# Altium PCB 0-PCB4.PcbDoc
Units mil, origin at the board's own origin, x right, y up, seen from the top; angles counter-clockwise.
Board outline 1878.39 x 1878.39 mil, 2 copper layers (Top Layer, Bottom Layer); 29 components, 33 nets, 249 pads, 28 vias.
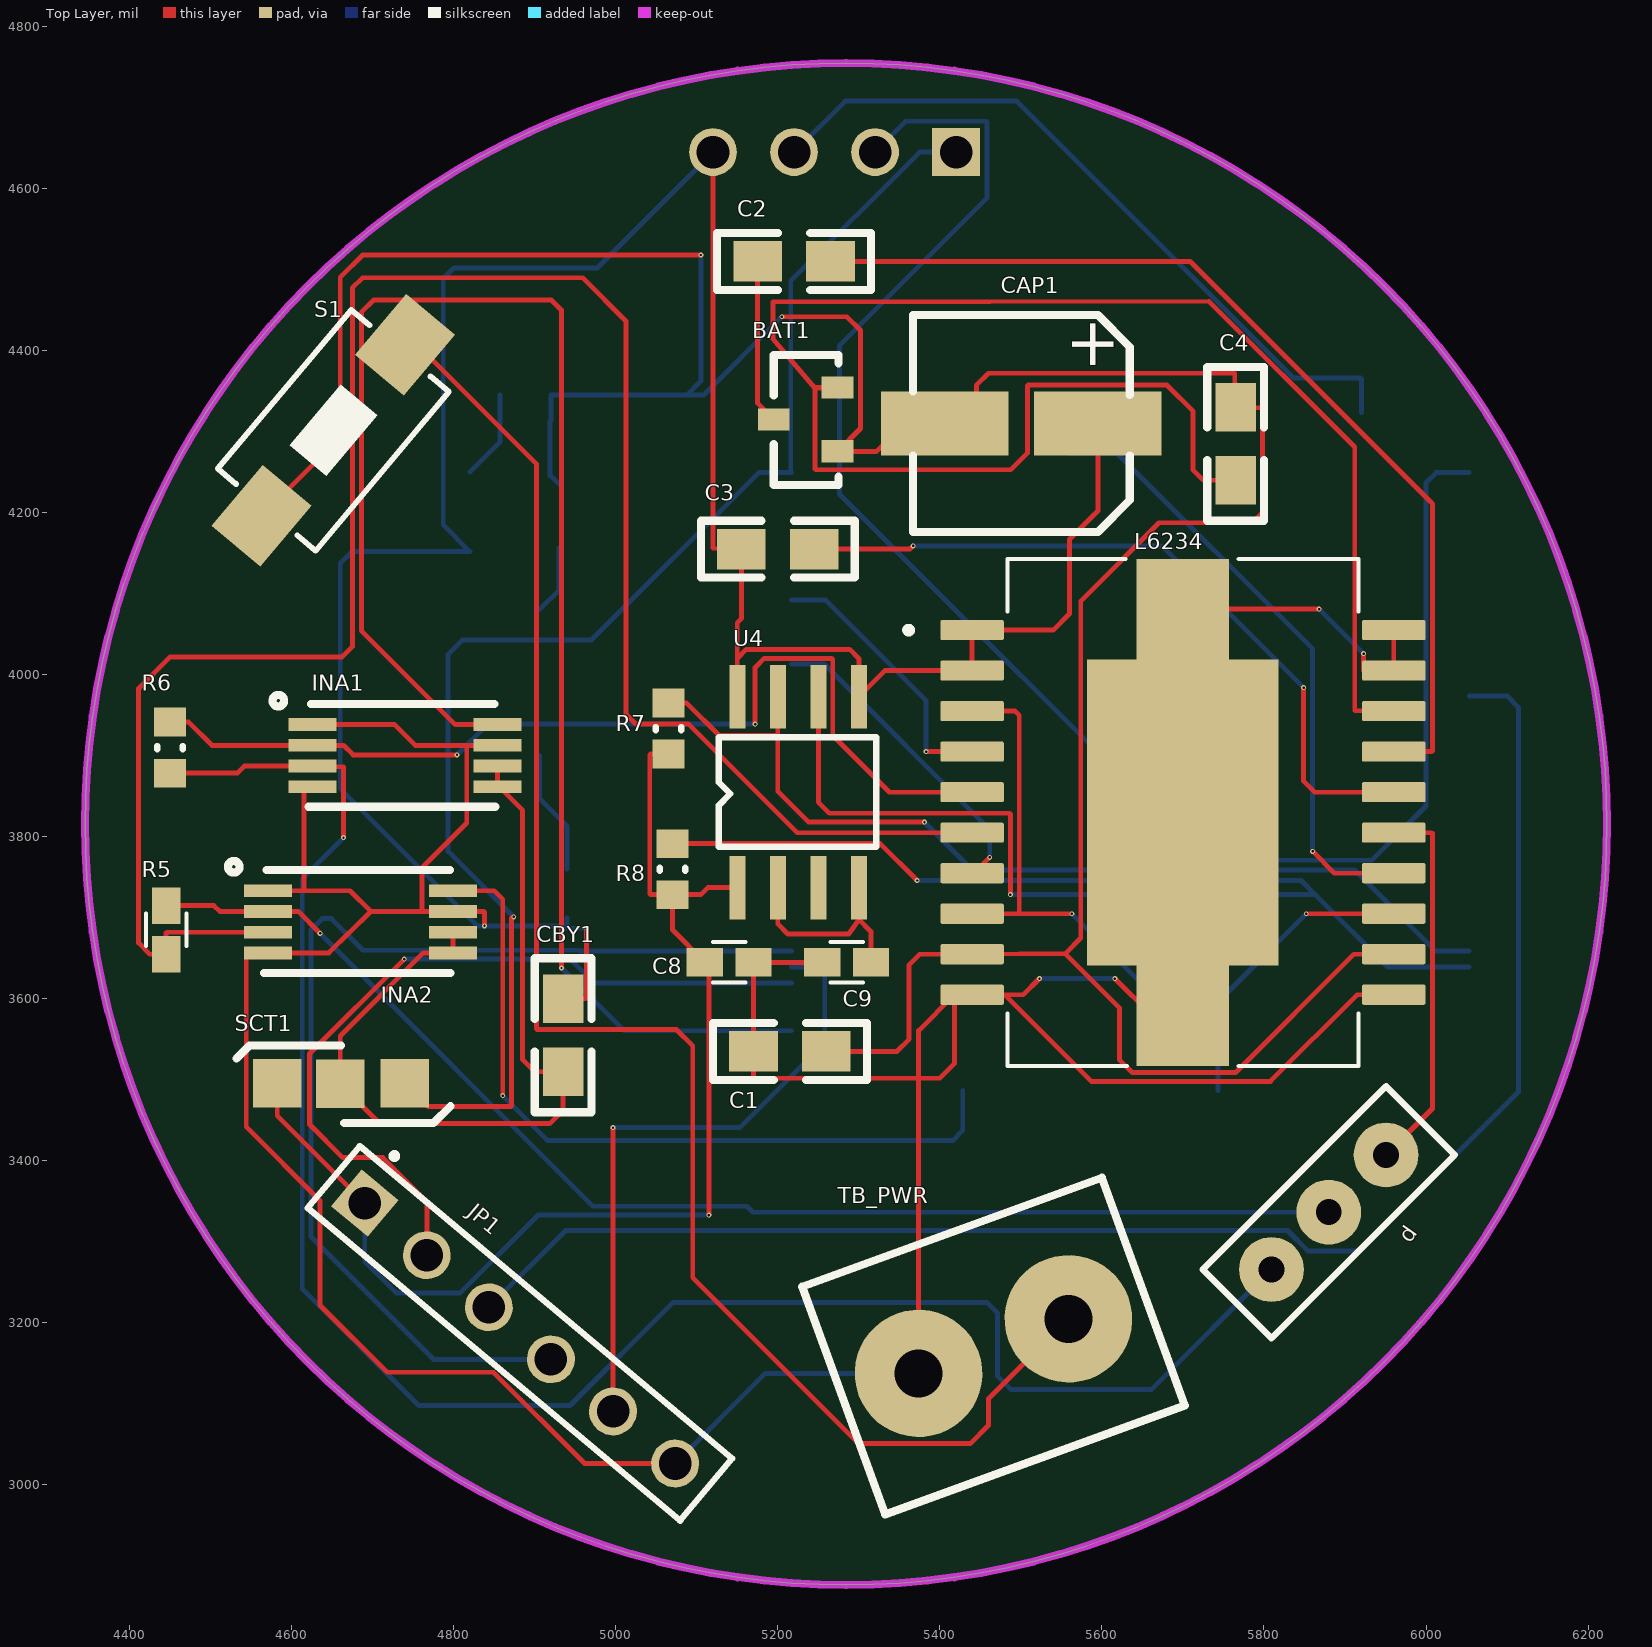
[diagram p0: Top Layer view]
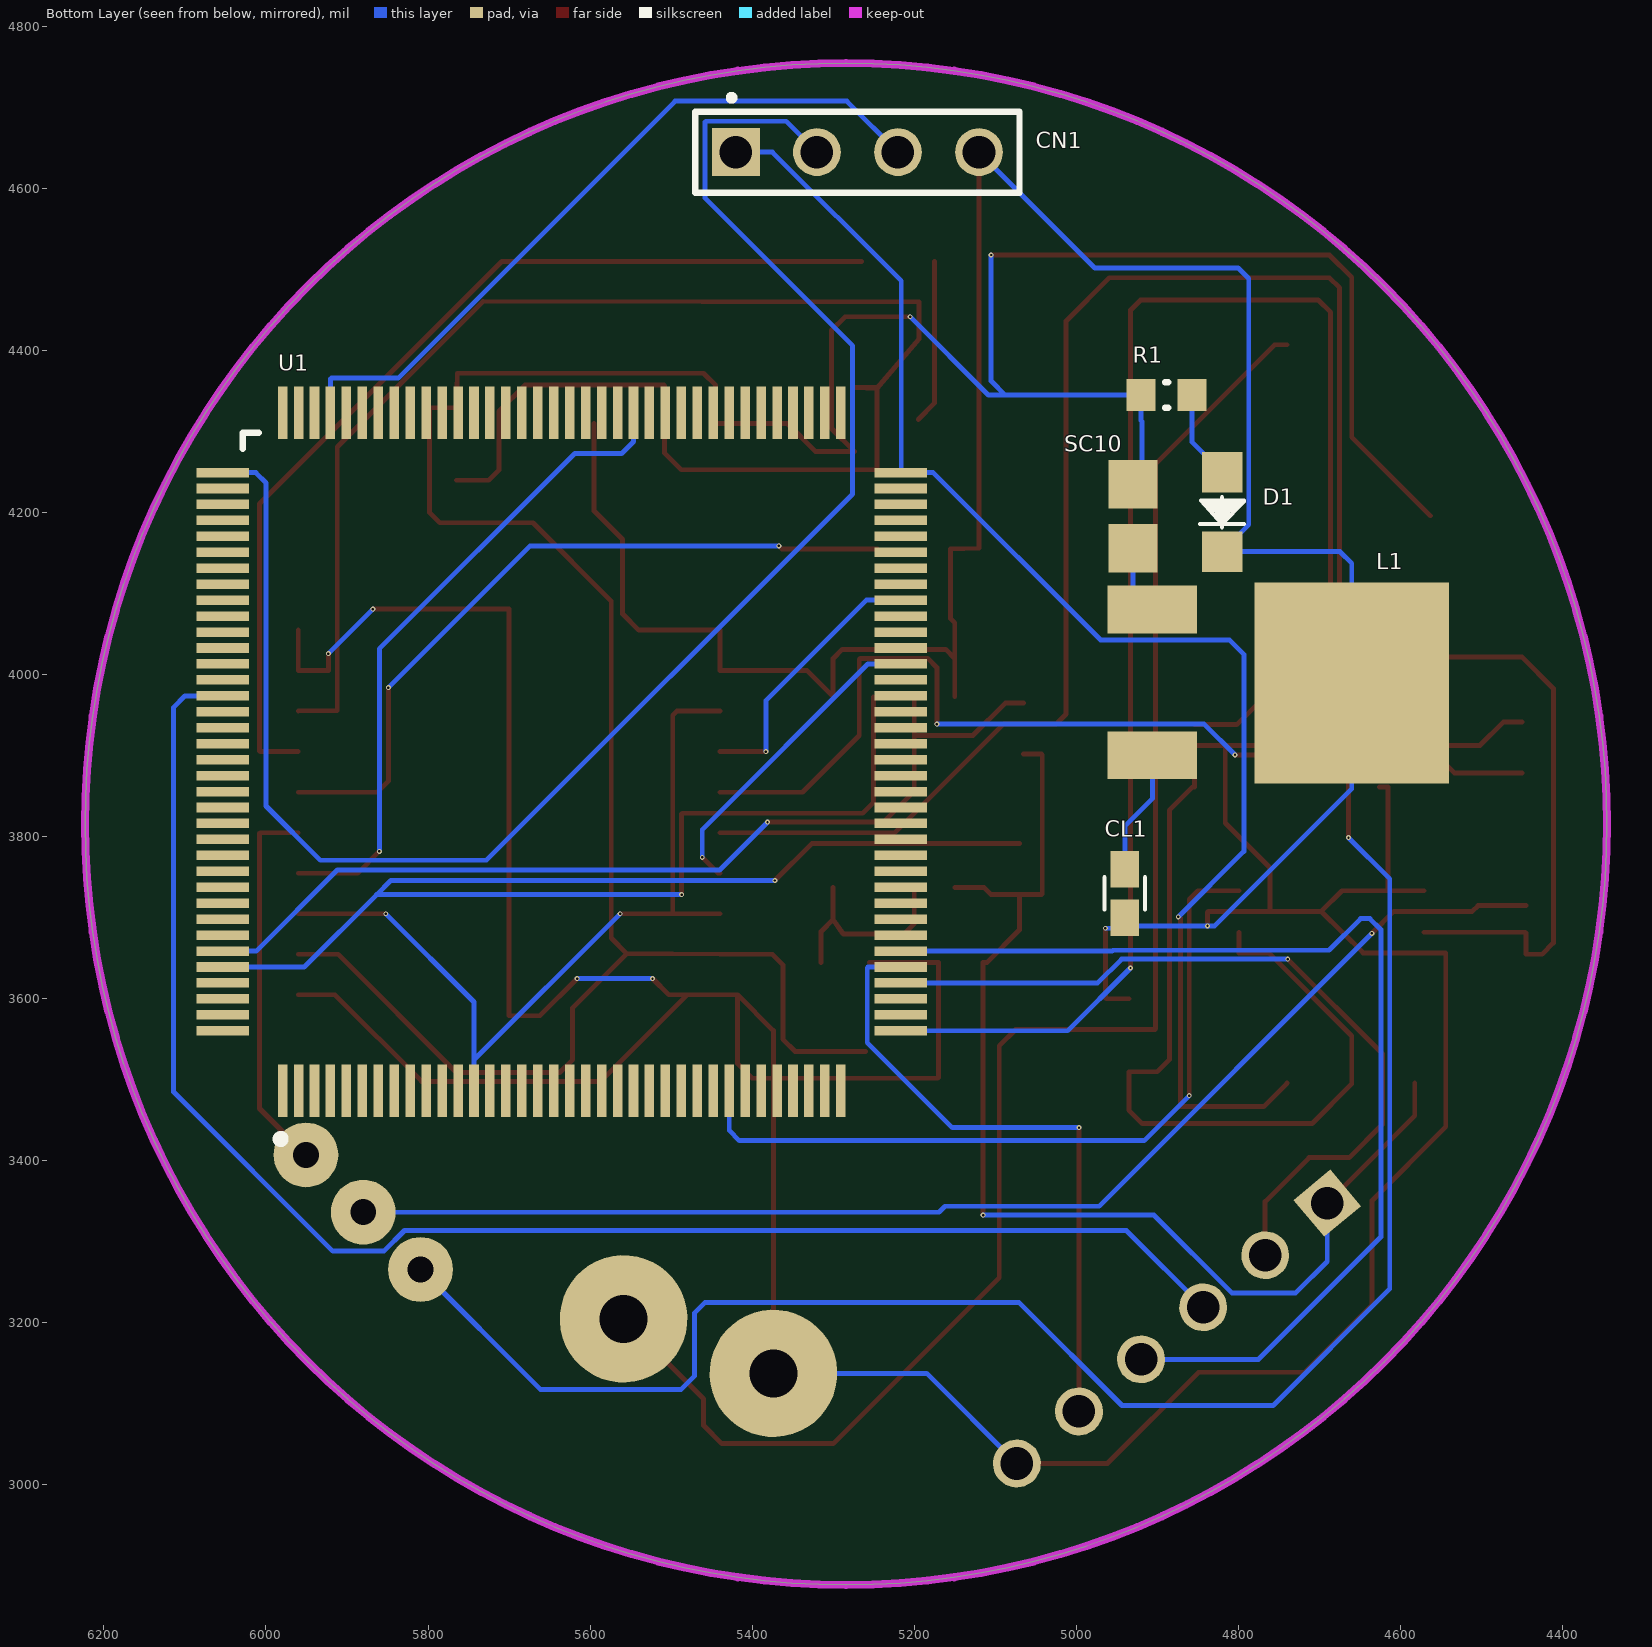
[diagram p1: Bottom Layer view, seen from below]

## Layer stack, top to bottom
Top Solder: solder mask 0.4, Solder Resist, Dk 3.5
Top Layer: signal copper 1.4
Dielectric 1: dielectric 12.6, FR-4, Dk 4.8
Bottom Layer: signal copper 1.4
Bottom Solder: solder mask 0.4, Solder Resist, Dk 3.5

## Board outline
4344.95,3815.73 ccw(c5284.15,3815.73) 5284.15,2876.54 ccw(c5284.15,3815.73) 6223.35,3815.73 ccw(c5284.15,3815.73) 5284.15,4754.93 ccw(c5284.15,3815.73)

## Design rules (kind name [scope] priority, off if disabled: settings)
Clearance [All] p1: gap=5 ignorepadtopadclearanceinfootprint=FALSE
MinimumSolderMaskSliver [All] p1: minsoldermaskwidth=5
PolygonConnect [All] p1: connectstyle=Relief reliefconductorwidth=10 reliefentries=4 polygonreliefangle="90 Angle" airgapwidth=10
RoutingVias [All] p1: holewidth=3 width=6 viastyle="Through Hole" minholewidth=2 minwidth=5 maxholewidth=4 maxwidth=7
SilkToSolderMaskClearance [IsPad] p1: minsilkscreentomaskgap=5 clearancetoexposedcopper=TRUE
SolderMaskExpansion [All] p1: expansion=4
Width [All] p1: maxlimit=20 minlimit=6 preferedwidth=6 minimp=50.000000 maximp=50.000000 favimp=50.000000
28 further rules are at their usual default settings.

## Components (designator, comment, footprint, x,y, rotation, side; value= is the part's Value field where it differs from the comment)
BAT1 "BAT54S" BAT54s 5195,4354.37 r0 top
C1 "100nF" C0805 5260,3535 r180 top
C2 "10nF" C0805 5175,4510 r0 top
C3 "1μF" C0805 5245,4155 r180 top
C4 "220nF" C0805 5765,4330 r270 top
C8 "100nF" R/C-0603 5110,3645 r0 top
C9 "1μF" R/C-0603 5315,3645 r180 top
CAP1 "EEH-ZA1E101XP" EEH-ZA1E101XP 5366.65,4176.14 r0 top
CBY1 "0.1μF" C0805 4935,3510 r90 top
CL1 "0.1μF" R/C-0603 4940,3760 r270 bottom
CN1 "SWD" HDR_1x4_2R54_V_M 5420,4645 r180 bottom
d "TB002-500-03BE" 10.7MHZ 5950.71,3407.32 r225 top
D1 "LED" D0805+ 4820,4250 r270 bottom
INA1 "INA240A1" INA240 4740,3900 r270 top
INA2 "INA240A2" INA240 4685,3695 r270 top
JP1 "SPI1" HDR_1x6_2R54_V_M 4690.19,3347.84 r320 top
L1 "l78M08" L7805 4644.25,3990 r180 bottom
L6234 "L6234PD013TR" SOIC127P1420X360-21N 5700,3830 r0 top
R1 "2K" 0603R 4888.5,4345 r180 bottom
R5 "10mOhm" R/C-0603 4445,3655 r90 top
R6 "10mOhm" 0603R 4450,3910 r270 top value=1K
R7 "4.7KOhm" 0603R 5065,3933.5 r270 top
R8 "4.7kOhm" 0603R 5070,3760 r270 top
S1 "SW SPST" SW_PB2_A1 4650,4300 r320 top
SC10 "solder_connection" solder_connection 4930,4235 r270 bottom
SCT1 "solder_connection_tripple" solder_connection_tripple 4660.98,3495.98 r180 top
TB_PWR "TB002-500-02BE" TB002-500-02BE 5373.71,3137.67 r20 top
U1 "MCU_LQFP144" LQFP144_0R5_SKT 5635,3905 r180 bottom
U4 "AS5600" "SOIC 8" 5225,3855 r90 top

## Footprints (in the part's own frame and the unit in brackets; to place one, negate y for a bottom-side part, rotate by r counter-clockwise, add the part's x,y. Pads: shape width x height; smd on the part's side, far side on the other; paste and mask are expansions set on the pad)
10.7MHZ [mil]
  round 80 hole 32: 1(0,0) 2(200,0) 3(100,0)
  silkscreen extent -60,-60 260,60
0603R [mm] "Chip Resistor, Body 1.6x0.8mm, IPC Medium Density"
  rect 0.9x1 smd: 1(-0.8,0) 2(0.8,0)
  silkscreen extent -0.05,-0.4 0.05,0.4, body extent -0.85,-0.47 0.85,0.47, height 0.6
BAT54s [mm]
  rect 1x0.7 smd: 1(2,-2) 2(2,0) 3(0,-1)
  silkscreen extent 0,-3.05 2.03,1.02, body extent -0.46,-2.48 2.46,0.44, height 1
C0805 [mil]
  rect 60x50 smd: 1(0,0) 2(90,0)
  silkscreen extent -50,-35 140,35
D0805+ [mil]
  rect 50x50 smd: A(0,0) K(98,0)
  silkscreen extent 31,-27 68,27
EEH-ZA1E101XP [mm]
  rect 4x2 smd: 1(1,3.4) 2(5.8,3.4)
  silkscreen extent 0,0 6.8,6.8, body extent -0.3,0.2 7,6.8, height 7.7
HDR_1x4_2R54_V_M [mm] "Male Header, Pitch 2.54mm, 4x1 Position, Mated Height 6mm, Tail Length 3mm"
  rect 1.5x1.5 hole 1.02: 1(0,0)
  round 1.5 hole 1.02: 2(2.54,0) 3(5.08,0) 4(7.62,0)
  silkscreen extent -1.27,-1.27 8.89,1.76, body extent -1.27,-1.27 8.89,1.27, height 9
HDR_1x6_2R54_V_M [mm] "Male Header, Pitch 2.54mm, 6x1 Position, Mated Height 6mm, Tail Length 3mm"
  rect 1.5x1.5 hole 1.02: 1(0,0)
  round 1.5 hole 1.02: 2(2.54,0) 3(5.08,0) 4(7.62,0) 5(10.16,0) 6(12.7,0)
  silkscreen extent -1.27,-1.27 13.97,1.79, body extent -1.27,-1.27 13.97,1.27, height 9
INA240 [mm]
  rect 0.4x1.5 smd mask+0.05: 1(-0.975,-2.9) 2(-0.325,-2.9) 3(0.325,-2.9) 4(0.975,-2.9) 5(0.975,2.9) 6(0.325,2.9) 7(-0.325,2.9) 8(-0.975,2.9)
  silkscreen extent -1.91,-4.16 1.6,2.82, body extent -1.5,-3.3 1.5,3.3, height 1.2
L7805 [mm] "l7805"
  rect 2.8x1.5 smd: 1(-6.65,2.3) 3(-6.65,-2.272)
  rect 6.1x6.3 smd: 2(-0.4,0)
  body extent -7.66,-3.3 2.06,3.1, height 2.3
LQFP144_0R5_SKT [mm] "32-bit MCU ARM-based Cortex-M3 20 X 20mm, 0.5mm Pitch, 1.6mm Max thickness"
  rect 0.3x1.65 smd: 1(-8.75,-10.625) 2(-8.25,-10.625) 3(-7.75,-10.625) 4(-7.25,-10.625) 5(-6.75,-10.625) 6(-6.25,-10.625) 7(-5.75,-10.625) 8(-5.25,-10.625) 9(-4.75,-10.625) 10(-4.25,-10.625) 11(-3.75,-10.625) 12(-3.25,-10.625) 13(-2.75,-10.625) 14(-2.25,-10.625) 15(-1.75,-10.625) 16(-1.25,-10.625) 17(-0.75,-10.625) 18(-0.25,-10.625) 19(0.25,-10.625) 20(0.75,-10.625) 21(1.25,-10.625) 22(1.75,-10.625) 23(2.25,-10.625) 24(2.75,-10.625) 25(3.25,-10.625) 26(3.75,-10.625) 27(4.25,-10.625) 28(4.75,-10.625) 29(5.25,-10.625) 30(5.75,-10.625) 31(6.25,-10.625) 32(6.75,-10.625) 33(7.25,-10.625) 34(7.75,-10.625) 35(8.25,-10.625) 36(8.75,-10.625) 73(8.75,10.625) 74(8.25,10.625) 75(7.75,10.625) 76(7.25,10.625) 77(6.75,10.625) 78(6.25,10.625) 79(5.75,10.625) 80(5.25,10.625) 81(4.75,10.625) 82(4.25,10.625) 83(3.75,10.625) 84(3.25,10.625) 85(2.75,10.625) 86(2.25,10.625) 87(1.75,10.625) 88(1.25,10.625) 89(0.75,10.625) 90(0.25,10.625) 91(-0.25,10.625) 92(-0.75,10.625) 93(-1.25,10.625) 94(-1.75,10.625) 95(-2.25,10.625) 96(-2.75,10.625) 97(-3.25,10.625) 98(-3.75,10.625) 99(-4.25,10.625) 100(-4.75,10.625) 101(-5.25,10.625) 102(-5.75,10.625) 103(-6.25,10.625) 104(-6.75,10.625) 105(-7.25,10.625) 106(-7.75,10.625) 107(-8.25,10.625) 108(-8.75,10.625)
  rect 1.65x0.3 smd: 37(10.625,-8.75) 38(10.625,-8.25) 39(10.625,-7.75) 40(10.625,-7.25) 41(10.625,-6.75) 42(10.625,-6.25) 43(10.625,-5.75) 44(10.625,-5.25) 45(10.625,-4.75) 46(10.625,-4.25) 47(10.625,-3.75) 48(10.625,-3.25) 49(10.625,-2.75) 50(10.625,-2.25) 51(10.625,-1.75) 52(10.625,-1.25) 53(10.625,-0.75) 54(10.625,-0.25) 55(10.625,0.25) 56(10.625,0.75) 57(10.625,1.25) 58(10.625,1.75) 59(10.625,2.25) 60(10.625,2.75) 61(10.625,3.25) 62(10.625,3.75) 63(10.625,4.25) 64(10.625,4.75) 65(10.625,5.25) 66(10.625,5.75) 67(10.625,6.25) 68(10.625,6.75) 69(10.625,7.25) 70(10.625,7.75) 71(10.625,8.25) 72(10.625,8.75) 109(-10.625,8.75) 110(-10.625,8.25) 111(-10.625,7.75) 112(-10.625,7.25) 113(-10.625,6.75) 114(-10.625,6.25) 115(-10.625,5.75) 116(-10.625,5.25) 117(-10.625,4.75) 118(-10.625,4.25) 119(-10.625,3.75) 120(-10.625,3.25) 121(-10.625,2.75) 122(-10.625,2.25) 123(-10.625,1.75) 124(-10.625,1.25) 125(-10.625,0.75) 126(-10.625,0.25) 127(-10.625,-0.25) 128(-10.625,-0.75) 129(-10.625,-1.25) 130(-10.625,-1.75) 131(-10.625,-2.25) 132(-10.625,-2.75) 133(-10.625,-3.25) 134(-10.625,-3.75) 135(-10.625,-4.25) 136(-10.625,-4.75) 137(-10.625,-5.25) 138(-10.625,-5.75) 139(-10.625,-6.25) 140(-10.625,-6.75) 141(-10.625,-7.25) 142(-10.625,-7.75) 143(-10.625,-8.25) 144(-10.625,-8.75)
  silkscreen extent -10,-12.27 -8.69,10
R/C-0603 [mil]
  rect 45x35 smd: 1(0,0) 2(60,0)
  silkscreen extent 10,-25 50,25
SOIC127P1420X360-21N [mm]
  rrect16% 1.99x0.63 smd: 1(-6.61,5.715) 2(-6.61,4.445) 3(-6.61,3.175) 4(-6.61,1.905) 5(-6.61,0.635) 6(-6.61,-0.635) 7(-6.61,-1.905) 8(-6.61,-3.175) 9(-6.61,-4.445) 10(-6.61,-5.715) 11(6.61,-5.715) 12(6.61,-4.445) 13(6.61,-3.175) 14(6.61,-1.905) 15(6.61,-0.635) 16(6.61,0.635) 17(6.61,1.905) 18(6.61,3.175) 19(6.61,4.445) 20(6.61,5.715)
  rect 6x9.6 smd paste-6: 21(0,0)
  rect 2.9x3.15 smd paste-3: 22(0,6.375) 23(0,-6.375)
  silkscreen extent -8.7,-7.95 5.5,7.95
"SOIC 8" [mm]
  rect 2x0.5 smd: 1(-2.993,1.905) 2(-2.993,0.635) 3(-2.993,-0.635) 4(-2.993,-1.905) 5(2.993,-1.905) 6(2.993,-0.635) 7(2.993,0.635) 8(2.993,1.905)
  silkscreen extent -1.71,-2.45 1.72,2.48
solder_connection [mil]
  rect 60x60 smd: 1(0,0) 2(78.74,0)
solder_connection_tripple [mil]
  rect 60x60 smd: 1(0.98,0.98) 2(78.74,0) 3(-78.74,0)
  Top Layer region: -28.54,34.45
  silkscreen extent -135,-46 129,49
SW_PB2_A1 [mm]
  rect 2x2.5 smd: 1(0,3.556) 2(0,-3.444)
  silkscreen extent -2,-3.19 2,3.31, body extent -2.03,-3.18 2.03,3.3, height 1.2
TB002-500-02BE [mm] "TB002-500-02BE"
  round 4 hole 1.5: 1(0,0) 2(5,0)
  silkscreen extent -2.5,-3.8 7.5,3.8, body extent -2.5,-4.4 7.5,4.6, height 13.55

## Part data
BAT1: Supplier Part Number 1=512-BAT54S, Supplier 1=Mouser
C1 C2 C3 C4 CBY1: library part CAP_1
C8 C9 CL1: library part CAP, "Capacitor"
CAP1: Supplier Part Number 1=667-EEH-ZA1E101XP, Supplier 1=Mouser
CN1: library part "Header 4", "Header, 4-Pin, Single row", Publisher="Altium Limited", Revision="17-Jul-2002: Re-released for DXP Platform."
d: Supplier Part Number 1=490-TB002-500-03BE, Supplier 1=Mouser
INA1 INA2: library part INA240, Supplier Part Number 1=595-INA240A2PWR, Supplier 1=Mouser
JP1: library part "HEADER 6"
L6234: "Motor Driver BiCDMOS Parallel PowerSO-20", Package="SO-20 STMicroelectronics", Digi-Key_Part_Number=497-5352-1-ND, Digi-Key_Purchase_URL=https://www.digikey.com/product-detail/en/stmicroelectronics/L6234PD013TR/497-5352-1-ND/1154483?utm_source=snapeda&utm_medium=aggregator&utm_campaign=symbol, MF=STMicroelectronics, MP=L6234PD013TR, SnapEDA_Link=https://www.snapeda.com/parts/L6234PD013TR/STMicroelectronics/view-part/75337/?ref=snap
R1: library part RES1
R5 R7 R8: library part RES2
R6: library part Res1, "Resistor", Ordered by=Subcon, Published=8-Jun-2000, Publisher="Altium Limited", Revision="July-2002: Re-released for DXP Platform."
TB_PWR: Supplier Part Number 1=490-TB002-500-02BE, Supplier 1=Mouser

## Via types
v1: diameter 6, hole 3, Top Layer to Bottom Layer, 28 vias

## Nets (pads, with @x,y where several pads share a name; then routed paths per layer and width w, separated by ;. In a path a pad name is that pad's centre, name@x,y a point inside that pad or via, vN(x,y) a via of type N, cw(c..) or ccw(c..) an arc to the next point about the centre after c; other vN are vias at no path point)
+3.3: CN1.1 SCT1.3 U1.72 | length 1759.7
  Top Layer w6: SCT1.3 4768.71,3467 4870.5,3467 4871.5,3468 4871.5,3700 4872.5,3701 v1(4874,3701)
  Bottom Layer w6: v1(4874,3701) 4793,3782 4793,4025 4811,4043 4970,4043 5176.49,4249.49 U1.72@5216,4249.49 ; U1.72 U1.72@5216,4249.49 ; CN1.1 5375,4645 5216,4486 U1.72@5216,4249.49
+5: C8.1 JP1.1 R7.2 R8.2 SCT1.2 U4.1 | length 1469.5
  Top Layer w6: SCT1.2 4582.24,3455.78 JP1.1 ; R7.2 5043,3902.01 5042,3901.01 5042,3729.51 5043,3728.51 R8.2 ; v1(5115,3333) 5115,3645 C8.1 5070,3685 R8.2 ; U4.1 5113.66,3737.17 5105,3728.51 R8.2
  Bottom Layer w6: JP1.1 4690.19,3275.81 4729,3237 4808,3237 4904,3333 v1(5115,3333)
GND: C1.2 C3.2 C8.2 C9.2 CAP1.2 CBY1.2 CL1.2 CN1.4 D1.K INA1.1 INA1.4 INA1.7 INA2.1 INA2.4 INA2.7 JP1.6 L1.2 L6234.1 L6234.2 L6234.10 L6234.11 L6234.19 L6234.20 L6234.21 L6234.22 L6234.23 TB_PWR.1 U4.5 U4.8 | length 8402.5
  Top Layer w6: INA2.1 4614,3733.39 ; INA1.4 4615,3861.61 4615,3734.39 4614,3733.39 ; INA1.1 4727,3938.39 4752.59,3912.8 4817,3912.8 ; v1(4838,3690) 4838,3706.8 4837,3707.8 INA2.7 4762,3707.8 ; INA1.7 4817,3912.8 ; CBY1.2 4963,3600 4964,3601 v1(4964,3687) ; JP1.6 4961.56,3026.44 4849,3139 4718,3139 4635,3222 4635,3351 4544,3442 4544,3656.61 INA2.4 4646,3656.61 4697.59,3707.8 ; CN1.4 5120,4156 C3.2 5155,4069 5150,4064 5150,4020 ; U4.8 5150,4020 ; C9.2 C8.2 C1.2 5170,3503 5171,3502 5373.71,3502 ; TB_PWR.1 5373.71,3502 ; v1(5523,3625) 5503,3605 5480,3605 ; CAP1.2 5595,4202 5560,4167 5560,4075 5540,4055 L6234.1 L6234.2 5332.17,4005 U4.5 5300,4020 5288.79,4031.21 5161.21,4031.21 5150,4020 ; v1(5616.01,3625) 5662,3579.01 L6234.23 L6234.21 L6234.22 v1(5868,4080.98) ; v1(5923,4025.98) 5923,4005 L6234.19 L6234.20 ; L6234.11 5915,3605 5808,3498 5587,3498 5480,3605 ; 4614,3733.39 4672,3733.39 4697.59,3707.8 ; 4697.59,3707.8 4762,3707.8 ; 4762,3707.8 4761,3708.8 4761,3762 4816,3817 4816,3911.8 4817,3912.8 ; 5373.71,3502 5373.71,3560.71 L6234.10@5418,3605 ; 5373.71,3502 5400,3502 5418,3520 L6234.10@5418,3605 ; L6234.10@5418,3605 L6234.10 5480,3605
  Bottom Layer w6: v1(4838,3690) 4829,3690 ; CL1.2@4939.97,3689.69 v1(4838,3690) 4829,3690 ; CL1.2 4940,3689.69 4940,3687 v1(4964,3687) ; JP1.6 5184.44,3137.67 TB_PWR.1 ; CN1.4 4977,4502 4800,4502 4787,4489 4787,4185 D1.K 4674.5,4152 4660,4137.5 L1.2 4660,3859 4829,3690 ; v1(5523,3625) v1(5616.01,3625) ; v1(5868,4080.98) v1(5923,4025.98)
NetBAT1_2: BAT1.2 C4.2 L6234.18 | length 2149.3
  Top Layer w6: C4.2 5725,4240 5712.5,4252.5 5712.5,4325.24 5680.37,4357.37 5509,4357.37 5508,4356.37 5508,4273.5 5487.5,4253 5247,4253 5246,4254 5246,4353.37 ; L6234.18 5912,3956 5912,4281 5732,4461 5194,4460 5194,4414.37 5246,4353.37 ; 5246,4353.37 BAT1.2 5247,4354.37 5246,4353.37
NetBAT1_3: BAT1.3 C2.1 | length 203.3
  Top Layer w6: C2.1 5175,4335 BAT1.3
NetC2_2: C2.2 L6234.17 | length 1219.9
  Top Layer w6: C2.2 5708.84,4510 6008,4210.84 6008,3906 6007,3905 L6234.17
NetC3_1: C3.1 L6234.16 | length 910.5
  Top Layer w6: C3.1 5363,4155 v1(5367,4159) ; v1(5849,3984) 5849,3868.5 5862.5,3855 L6234.16
  Bottom Layer w6: v1(5367,4159) 5674,4159 v1(5849,3984)
NetC9_1: C9.1 U4.2 U4.4 | length 257.6
  Top Layer w6: U4.2 5200,3692.5 5212.5,3680 5287.5,3680 U4.4@5300,3698 ; U4.4 U4.4@5300,3698 ; C9.1 5315,3683 U4.4@5300,3698
NetCBY1_1: CBY1.1 INA1.5 INA1.6 INA2.5 INA2.6 SCT1.1 | length 1048.2
  Top Layer w6: INA2.6 INA2.5 4762.5,3656.61 4660,3554.11 SCT1.1 4709,3446 4918.5,3446 4935,3462.5 CBY1.1 4900,3510 4885,3525 4885,3832.61 4856,3861.61 INA1.5 INA1.6
NetCL1_1: CL1.1 L1.3 | length 154.6
  Bottom Layer w6: L1.3 4906.06,3846.94 4940,3813 CL1.1
NetCN1_2: CN1.2 U1.109 | length 2085
  Bottom Layer w6: CN1.2 5358,4683 5457,4683 5458,4682 5458,4588 5276,4406 5276,4223 5728,3771 5933,3771 6000,3838 6000,4236.99 6012.5,4249.49 U1.109
NetCN1_3: CN1.3 U1.105 | length 910.3
  Bottom Layer w6: CN1.3 5283,4708 5495,4708 5837,4366 5919.43,4366 5920.43,4365 U1.105
NetD1_A: D1.A R1.2 | length 110.3
  Bottom Layer w6: D1.A 4857.01,4287.01 R1.2
Netd_1: d.1 L6234.15 | length 468.6
  Top Layer w6: d.1 6008,3464.61 6008,3804 6007,3805 L6234.15
Netd_2: d.2 INA1.3 R6.2 | length 2342.8
  Top Layer w6: R6.2 4533,3878.51 4541.7,3887.2 INA1.3 4664,3886.2 v1(4664,3799)
  Bottom Layer w6: v1(4664,3799) 4613,3748 4613,3242 4757,3098 4943.5,3098 5070.5,3225 5458.5,3225 5471,3212.5 5471,3134.5 5487.5,3118 5661.39,3118 d.2
Netd_3: d.3 INA2.2 R5.2 | length 1591.7
  Top Layer w6: R5.2 4504,3715 4511.2,3707.8 INA2.2 4608,3707.8 v1(4635,3680.8)
  Bottom Layer w6: v1(4635,3680.8) 4971.78,3344.02 5161.96,3344.02 5169.38,3336.6 d.3
NetINA1_2: INA1.2 L6234.5 R6.1 | length 1220.3
  Top Layer w6: R6.1 4473,3941.5 4501.7,3912.8 INA1.2 4664,3912.8 4675.8,3901 v1(4804,3901) ; v1(5172,3939) 5172,4008.84 5183.36,4020.21 5266.64,4020.21 5267.84,4019 5267.84,3925 5337.84,3855 L6234.5
  Bottom Layer w6: v1(4804,3901) 4842,3939 v1(5172,3939)
NetINA1_8: INA1.8 U1.37 | length 1995.3
  Top Layer w6: INA1.8 4802,3938.39 4686,4054.39 4686,4447.18 4701.32,4462.5 4920.5,4462.5 4933,4450 v1(4933,3638)
  Bottom Layer w6: v1(4933,3638) 5010.49,3560.51 U1.37
NetINA2_3: INA2.3 L6234.6 R5.1 | length 2572.4
  Top Layer w6: INA2.3 4446,3682.2 4445,3681.2 R5.1 4425,3655 4411,3669 4411,3983 4450,4022 4662.5,4022 4675,4034.5 4675,4477.5 4687.5,4490 4959,4490 5012.5,4436.5 5012.5,3951.5 5025,3939 5090,3939 5224,3805 L6234.6
NetINA2_8: INA2.8 U1.29 | length 953.2
  Top Layer w6: INA2.8 4850,3733.39 4860.5,3722.89 v1(4860.5,3480.5)
  Bottom Layer w6: v1(4860.5,3480.5) 4916,3425 5415.81,3425 5428.31,3437.5 U1.29
NetJP1_2: JP1.2 U1.40 | length 992.8
  Top Layer w6: v1(4739,3649) 4622,3532 4622,3445 4663,3404 4712.5,3404 4766.79,3349.71 JP1.2
  Bottom Layer w6: v1(4739,3649) 4944,3649 4973.43,3619.57 U1.40
NetJP1_3: JP1.3 U1.123 | length 1943.1
  Bottom Layer w6: JP1.3 4938.12,3314 5829.07,3314 5854.46,3288.6 5917.6,3288.6 6114,3485 6114,3959.9 6100,3973.9 U1.123
NetJP1_4: JP1.4 U1.42 | length 1352.9
  Bottom Layer w6: JP1.4 4775,3155 4624,3306 4624,3685.5 4637.5,3699 4649,3699 4688,3660 4954.72,3660 4955.79,3658.94 U1.42
NetJP1_5: JP1.5 U1.41 | length 789.1
  Top Layer w6: JP1.5 v1(4996.6,3441)
  Bottom Layer w6: v1(4996.6,3441) 5153,3441 5258,3546 5258,3638.25 5257,3639.25 U1.41
NetL1_1: L1.1 SC10.2 | length 85.6
  Bottom Layer w6: L1.1 4930,4104.49 SC10.2
NetL6234_3: L6234.3 L6234.8 L6234.13 U1.13 | length 1055.4
  Top Layer w6: L6234.8 5497,3705 ; L6234.3 5493,3955 5498,3950 5498,3706 5497,3705 ; v1(5562.89,3705) 5497,3705 ; v1(5852.27,3705) L6234.13
  Bottom Layer w6: v1(5562.89,3705) 5743.27,3524.62 ; U1.13 5743.27,3524.62 ; v1(5852.27,3705) 5743.27,3596 5743.27,3524.62
NetL6234_4: L6234.4 U1.64 | length 337.4
  Top Layer w6: v1(5383,3905) L6234.4
  Bottom Layer w6: U1.64 5259,4092.01 5383,3968.01 v1(5383,3905)
NetL6234_7: L6234.7 U1.60 | length 393.6
  Top Layer w6: L6234.7 5442,3755 v1(5461.5,3774.5)
  Bottom Layer w6: U1.60 5257,4013.27 5461.5,3808.77 v1(5461.5,3774.5)
NetL6234_14: L6234.14 U1.86 | length 816.6
  Top Layer w6: v1(5860,3782) 5887,3755 L6234.14
  Bottom Layer w6: U1.86 5546.42,4287.5 5560.92,4273 5619,4273 5860,4032 v1(5860,3782)
NetR7_1: R7.1 U1.139 U4.7 | length 1203.8
  Top Layer w6: R7.1 5087.5,3965 5127.5,3925 5199,3925 5200,3926 ; U4.7 5200,3926 ; v1(5381,3818) 5238,3818 5200,3856 5200,3926
  Bottom Layer w6: v1(5381,3818) 5440,3759 5911.94,3759 6012,3658.94 U1.139
NetR8_1: R8.1 U1.140 U4.6 | length 1895.7
  Top Layer w6: R8.1 5326.5,3791.5 v1(5372,3746) ; U4.6 5250,3842.5 5263.5,3829 5486,3829 5487,3828 v1(5487,3728.5)
  Bottom Layer w6: v1(5372,3746) 5846,3746 5863.5,3728.5 ; v1(5487,3728.5) 5863.5,3728.5 ; U1.140 5952.75,3639.25 5863.5,3728.5
NetS1_1: S1.1 TB_PWR.2 | length 2039.6
  Top Layer w6: S1.1 4755.07,4407.24 4902,4260.31 4902,3563 4903,3562 5075,3562 5095,3542 5095,3255.93 5300,3050.93 5437.5,3050.93 5460,3073.43 5460,3106.32 TB_PWR.2
VCC1: BAT1.1 C1.1 C4.1 CAP1.1 L6234.9 L6234.12 R1.1 S1.2 SC10.1 | length 4113
  Top Layer w6: S1.2 4660,4293.29 4660,4490.5 4687.5,4518 v1(5105,4518) ; v1(5205,4441.72) 5285.28,4441.72 5302,4425 5302,4303.89 BAT1.1 5322,4275.63 5356.37,4310 CAP1.1 5445,4310 5445,4357 5460,4372 5764,4372 C4.1 5798,4329 5798,4200 5785.5,4187.5 5670.5,4187.5 5573.89,4090.89 5573.89,3675 5554.69,3655.81 ; C1.1 5347,3535 5362,3550 5362,3642 5375,3655 L6234.9 5554.69,3655.81 ; L6234.12 5911,3655 5765,3509 5637.5,3509 5621.64,3524.86 5621.64,3588.86 5554.69,3655.81
  Bottom Layer w6: SC10.1 4919,4246 4919,4312.73 4920,4313.73 R1.1 5087.5,4345 ; v1(5105,4518) 5105,4362.5 5087.5,4345 ; v1(5205,4441.72) 5108.28,4345 5087.5,4345
pads on no net: U1.1 U1.2 U1.3 U1.4 U1.5 U1.6 U1.7 U1.8 U1.9 U1.10 U1.11 U1.12 U1.14 U1.15 U1.16 U1.17 U1.18 U1.19 U1.20 U1.21 U1.22 U1.23 U1.24 U1.25 U1.26 U1.27 U1.28 U1.30 U1.31 U1.32 U1.33 U1.34 U1.35 U1.36 U1.38 U1.39 U1.43 U1.44 U1.45 U1.46 U1.47 U1.48 U1.49 U1.50 U1.51 U1.52 U1.53 U1.54 U1.55 U1.56 U1.57 U1.58 U1.59 U1.61 U1.62 U1.63 U1.65 U1.66 U1.67 U1.68 U1.69 U1.70 U1.71 U1.73 U1.74 U1.75 U1.76 U1.77 U1.78 U1.79 U1.80 U1.81 U1.82 U1.83 U1.84 U1.85 U1.87 U1.88 U1.89 U1.90 U1.91 U1.92 U1.93 U1.94 U1.95 U1.96 U1.97 U1.98 U1.99 U1.100 U1.101 U1.102 U1.103 U1.104 U1.106 U1.107 U1.108 U1.110 U1.111 U1.112 U1.113 U1.114 U1.115 U1.116 U1.117 U1.118 U1.119 U1.120 U1.121 U1.122 U1.124 U1.125 U1.126 U1.127 U1.128 U1.129 U1.130 U1.131 U1.132 U1.133 U1.134 U1.135 U1.136 U1.137 U1.138 U1.141 U1.142 U1.143 U1.144 U4.3

## Keep-outs
Keep-Out Layer:
  circle w10: c5284.15,3815.73 r939.2

## Text inside footprints (layer, text, board x,y; h text height)
CAP1: Top Overlay "+" at 5614.68,4372.99 h60 r90